# Altium PCB PCB1.pcbdoc
Units mm, origin at the board's own origin, x right, y up, seen from the top; angles counter-clockwise.
Board outline 84.78 x 58.5 mm, 2 copper layers (Top Layer, Bottom Layer); 31 components, 19 nets, 90 pads, 33 vias.
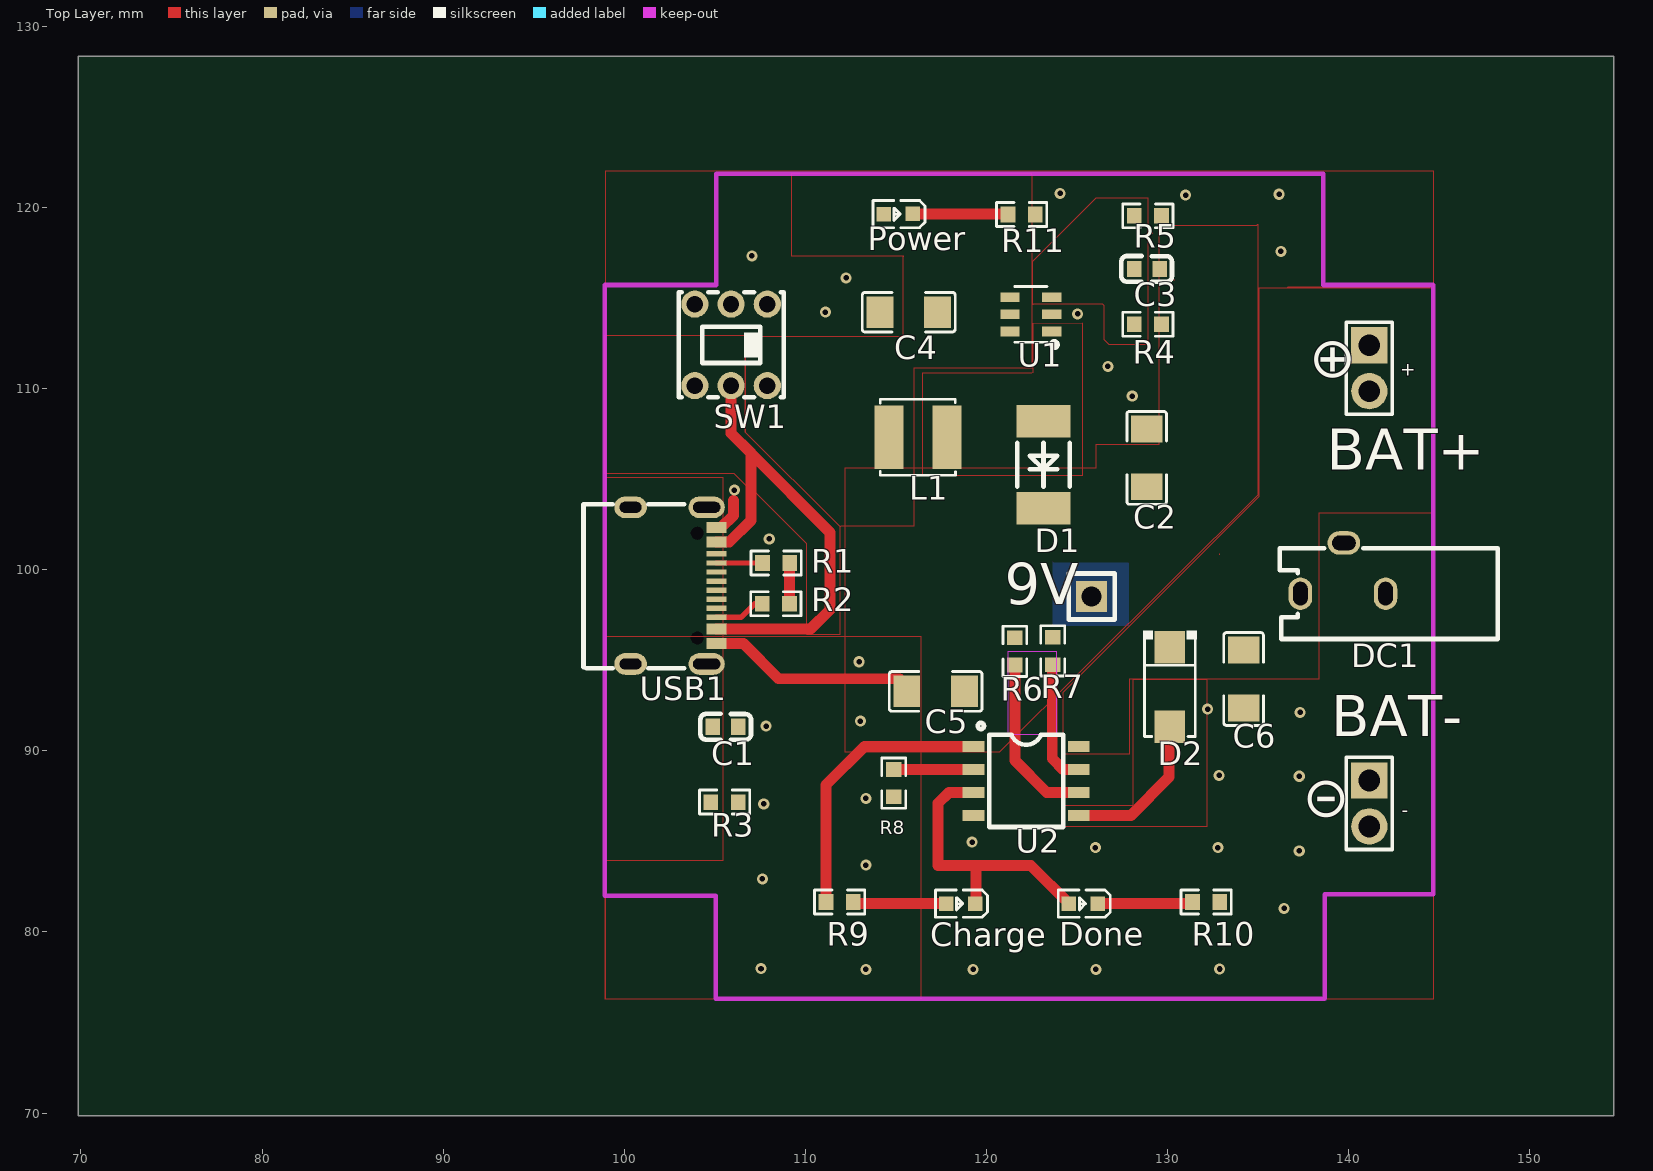
[diagram p0: Top Layer view]
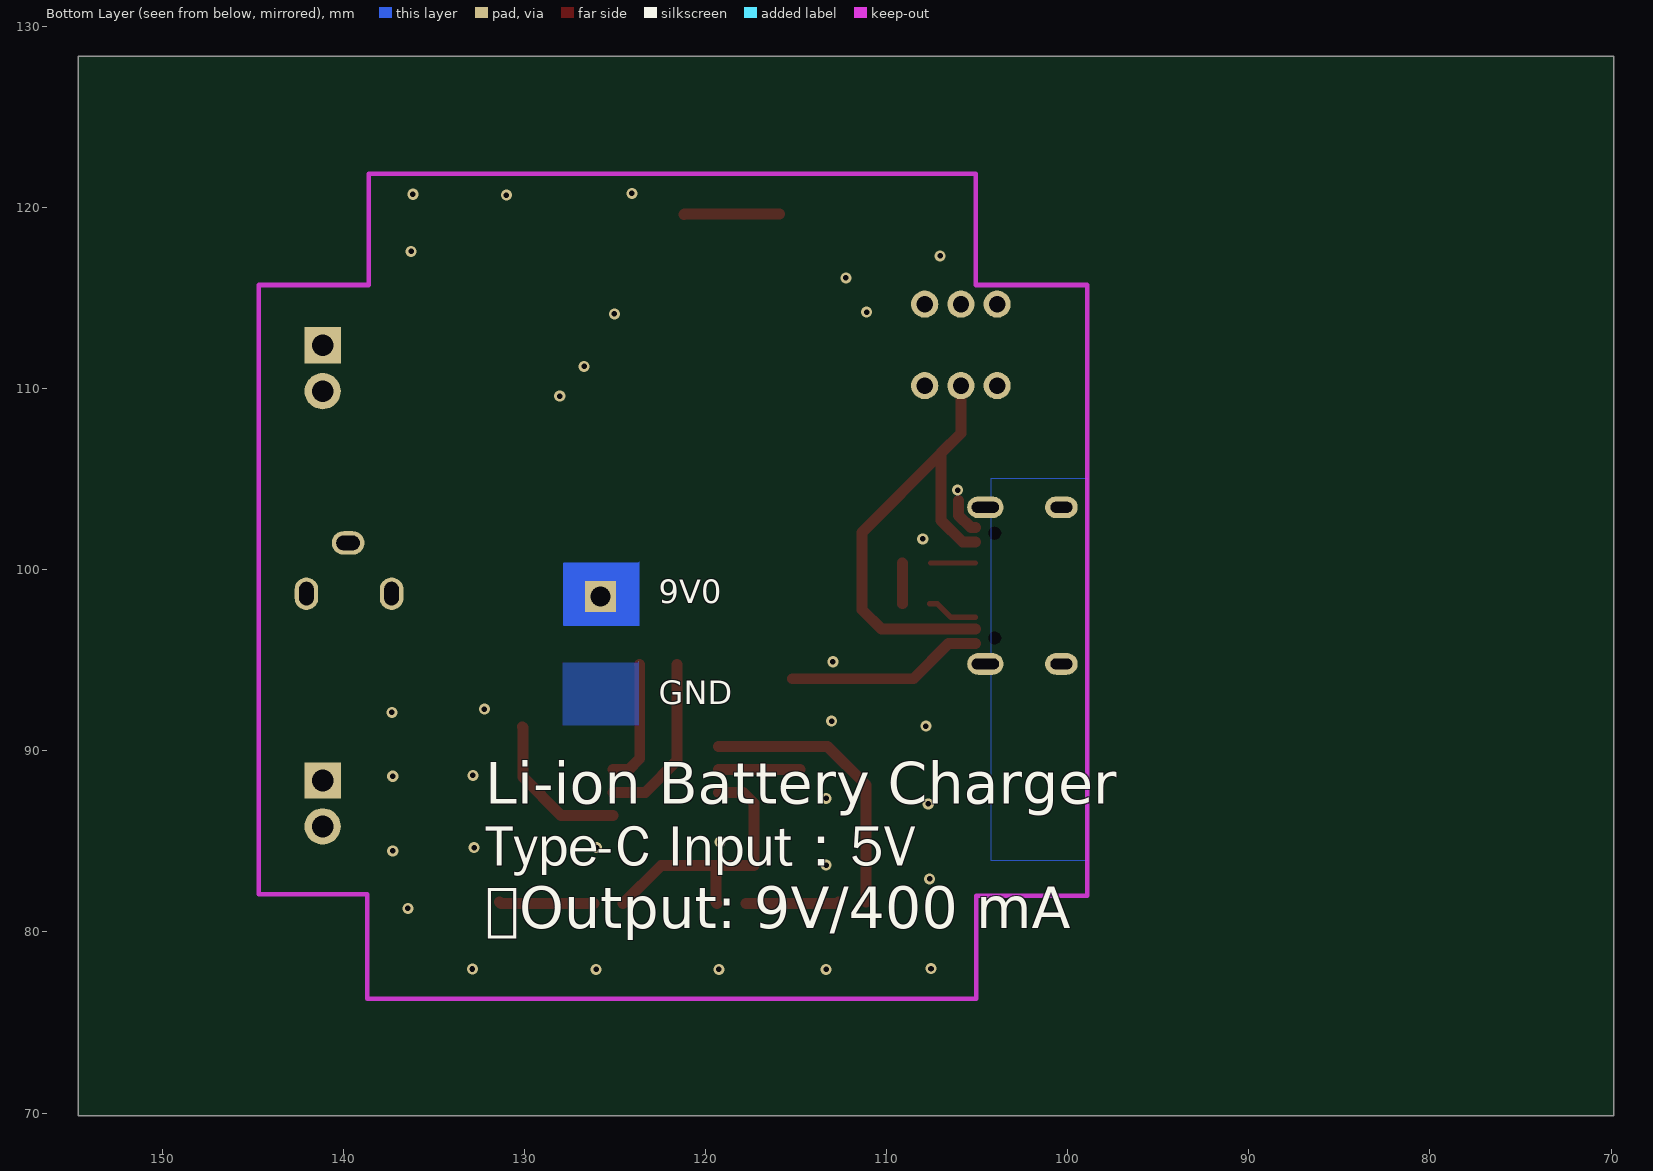
[diagram p1: Bottom Layer view, seen from below]

## Layer stack, top to bottom
Top Layer: signal copper (thickness not stored)
Dielectric: dielectric 0.32, FR-4, Dk 4.8
Bottom Layer: signal copper (thickness not stored)

## Board outline
154.626,69.85 69.85,69.85 69.85,128.346 154.626,128.346

## Components (designator, comment, footprint, x,y, rotation, side; value= is the part's Value field where it differs from the comment)
9V "2.54-1*1P针" HDR-TH_1P-P2.54-V-M 125.795,98.519 r0 top
+ "PZ254V-11-02P" HDR-TH_2P-P2.54-V-M 141.131,111.125 r270 top
- "PZ254V-11-02P" HDR-TH_2P-P2.54-V-M 141.131,87.095 r270 top
C1 "CC0603KRX7R9BB104" C0603 105.589,91.328 r180 top
C2 "CL31A226KAHNNNE" C1206 128.84,106.172 r270 top
C3 "CC0603JRNPO9BN220" C0603 128.846,116.603 r0 top
C4 "CL31A226KAHNNNE" C1206 115.7,114.215 r0 top
C5 "CL31A226KAHNNNE" C1206 117.185,93.28 r0 top
C6 "CL31A226KAHNNNE" C1206 134.189,93.962 r90 top
Charge "NCD0603R1_C84263" LED0603-RD_RED 118.564,81.565 r180 top
D1 "AS5822-AL" SMA-L_L4.4-W2.6-LS5.0-RD 123.14,105.791 r90 top
D2 "1N5819_C437199" SMA_L4.4-W2.6-LS5.0-RD 130.113,93.52 r270 top
DC1 "DC002-1.3" DC-IN-TH_DC002-1.3 139.676,100.074 r90 top
Done "NCD0603R1_C84263" LED0603-RD_RED 125.344,81.565 r180 top
L1 "SWPA4030S4R7MT" IND-SMD_L4.0-W4.0 116.206,107.309 r0 top
Power "NCD0603R1_C84263" LED0603-RD_RED 115.114,119.634 r180 top
R1 "0603WAF5101T5E" R0603 108.381,100.37 r0 top
R2 "0603WAF5101T5E" R0603 108.365,98.117 r0 top
R3 "0603WAF1002T5E" R0603 105.533,87.168 r180 top
R4 "0603WAF2103T5E" R0603 128.902,113.547 r0 top
R5 "0603WAF5101T5E" R0603 128.902,119.532 r0 top
R6 "0603WAF5101T5E" R0603 121.56,95.487 r270 top
R7 "0603WAF5101T5E" R0603 123.648,95.513 r270 top
R8 "NCP18XH103F03RB" R0603 114.874,88.214 r270 top
R9 "0603WAF5101T5E" R0603 111.888,81.649 r0 top
R10 "0603WAF5101T5E" R0603 132.12,81.649 r0 top
R11 "0603WAF5101T5E" R0603 121.933,119.605 r0 top
SW1 "XKB5858-Z" SW-TH_6P-L5.8-W5.8-P2.00-LS4.5-BL 105.894,112.409 r0 top
U1 "LP6238B6F" SOT-23-6_L2.9-W1.6-P0.95-LS2.8-BL 122.439,114.097 r90 top
U2 "IP2312U" ESOP-8_L4.9-W3.9-P1.27-LS6.0-BL-EP 122.186,88.341 r270 top
USB1 "TYPE-C 16PIN 2MD(073)" USB-C-SMD_TYPE-C-6PIN-2MD-073 102.719,99.12 r270 top

## Footprints (in the part's own frame and the unit in brackets; to place one, negate y for a bottom-side part, rotate by r counter-clockwise, add the part's x,y. Pads: shape width x height; smd on the part's side, far side on the other; paste and mask are expansions set on the pad)
C0603 [mm]
  rect 0.8x0.9 smd: 1(-0.7,0) 2(0.7,0)
  silkscreen extent -1.41,-0.71 1.39,0.72
C1206 [mm]
  rect 1.485x1.728 smd: 1(-1.593,0) 2(1.593,0)
  silkscreen extent -2.56,-1.09 2.56,1.09
DC-IN-TH_DC002-1.3 [mm]
  oval 1.8x1.3 hole 0.8 slot 1.3 at 0 deg: 1(-1.4,2.35) 3(-1.4,-2.35)
  oval 1.3x1.8 hole 0.8 slot 1.3 at 90 deg: 2(1.4,-0.05)
  silkscreen extent -3.9,-8.55 1.1,3.5
ESOP-8_L4.9-W3.9-P1.27-LS6.0-BL-EP [mm]
  rect 0.6x1.2 smd: 1(-1.905,-2.908) 2(-0.635,-2.908) 3(0.635,-2.908) 4(1.905,-2.908) 5(1.905,2.908) 6(0.635,2.908) 7(-0.635,2.908) 8(-1.905,2.908)
  silkscreen extent -3.2,-2.67 2.55,2.05
HDR-TH_1P-P2.54-V-M [mm]
  rect 1.7x1.7 hole 1.1: 1(0,0)
  silkscreen extent -1.27,-1.27 1.27,1.27
HDR-TH_2P-P2.54-V-M [mm]
  rect 2x2 hole 1.2: 1(-1.27,0)
  round 2 hole 1.2: 2(1.27,0)
  silkscreen extent -2.54,-1.27 2.54,1.27
IND-SMD_L4.0-W4.0 [mm]
  rect 1.6x3.5 smd: 1(-1.6,0) 2(1.6,0)
  silkscreen extent -2.08,-2.1 2.08,2.1
LED0603-RD_RED [mm]
  rect 0.8x0.8 smd: 1(-0.8,-0.003) 2(0.8,0.003)
  silkscreen extent -1.49,-0.75 1.39,0.76
R0603 [mm]
  rect 0.806x0.864 smd: 1(-0.753,0) 2(0.753,0)
  silkscreen extent -1.39,-0.66 1.39,0.66
SMA-L_L4.4-W2.6-LS5.0-RD [mm]
  rect 1.8x3 smd: 1(-2.4,0) 2(2.4,0)
  silkscreen extent -1.2,-1.45 1.2,1.45
SMA_L4.4-W2.6-LS5.0-RD [mm]
  rect 1.8x1.7 smd: 1(-2.192,0) 2(2.192,0)
  silkscreen extent -3.11,-1.48 2.73,1.48
SOT-23-6_L2.9-W1.6-P0.95-LS2.8-BL [mm]
  rect 0.532x1.072 smd: 1(-0.95,-1.149) 2(0,-1.149) 3(0.95,-1.149) 4(0.95,1.149) 5(0,1.149) 6(-0.95,1.149)
  silkscreen extent -1.82,-1.45 1.54,0.89
SW-TH_6P-L5.8-W5.8-P2.00-LS4.5-BL [mm]
  round 1.5 hole 0.9: 1(-2,-2.25) 2(0,-2.25) 3(2,-2.25) 4(-2,2.25) 5(0,2.25) 6(2,2.25)
  silkscreen extent -2.9,-2.9 2.9,2.9
USB-C-SMD_TYPE-C-6PIN-2MD-073 [mm]
  rect 0.6x1.1 smd: 1(-3.2,2.375) 2(-2.4,2.375) 11(2.4,2.375) 12(3.2,2.375)
  rect 0.3x1.1 smd: 3(-1.75,2.375) 4(-1.25,2.375) 5(-0.75,2.375) 6(-0.25,2.375) 7(0.25,2.375) 8(0.75,2.375) 9(1.25,2.375) 10(1.75,2.375)
  oval 1.2x2 hole 0.6 slot 1.5 at 90 deg: 13(-4.325,1.825) 14(4.325,1.825)
  oval 1.2x1.8 hole 0.6 slot 1.2 at 90 deg: 13(-4.325,-2.375) 14(4.325,-2.375)
  Multi-Layer board cut-out: -2.89,1.655 -3.042,1.62 -3.164,1.523 -3.231,1.383 -3.231,1.227 -3.164,1.087 -3.042,0.99 -2.89,0.955 -2.89,0.955 -2.738,0.99 -2.616,1.087 -2.549,1.227 -2.549,1.383 -2.616,1.523 -2.738,1.62 -2.89,1.655
  Multi-Layer board cut-out: 2.89,1.655 2.738,1.62 2.616,1.523 2.549,1.383 2.549,1.227 2.616,1.087 2.738,0.99 2.89,0.955 2.89,0.955 3.042,0.99 3.164,1.087 3.231,1.227 3.231,1.383 3.164,1.523 3.042,1.62 2.89,1.655
  silkscreen extent -4.5,-4.97 4.57,0.6

## Via types
v1: diameter 0.61, hole 0.305, Top Layer to Bottom Layer, 33 vias

## Nets (pads, with @x,y where several pads share a name; then routed paths per layer and width w, separated by ;. In a path a pad name is that pad's centre, name@x,y a point inside that pad or via, vN(x,y) a via of type N, cw(c..) or ccw(c..) an arc to the next point about the centre after c; other vN are vias at no path point)
$1N581: C1.2 R3.2 USB1.13 USB1.14
$1N716: R1.1 USB1.4 | length 2.5
  Top Layer w0.3: USB1.4 R1.1@107.568,100.37
$1N720: R2.1 USB1.10 | length 2.8
  Top Layer w0.3: USB1.10 106.44,97.37 107.187,98.117 R2.1
$1N1750: R8.1 U2.2 | length 4.5
  Top Layer w0.6: R8.1@114.778,88.976 U2.2
$1N2530: D1.2 L1.2 U1.1
$1N3681: C3.1 R4.1 R5.1 U1.3
$1N8246: R6.2 U2.6 | length 9.6
  Top Layer w0.6: R6.2@121.56,94.759 121.56,89.464 123.318,87.706 U2.6
$1N8621: R7.2 U2.7 | length 6.9
  Top Layer w0.6: R7.2 123.623,94.734 123.623,89.576 124.223,88.976 U2.7
$1N8720: D2.2 U2.5 | length 8.7
  Top Layer w0.6: U2.5 127.966,86.436 130.074,88.544 130.074,91.289 D2.2
$1N8960: Charge.2 R9.2 | length 5.2
  Top Layer w0.6: R9.2 112.729,81.562 Charge.2
$1N8993: Done.1 R10.1 | length 5.3
  Top Layer w0.6: Done.1 131.286,81.569 R10.1
$1N10215: Power.1 R11.1 | length 5.3
  Top Layer w0.6: Power.1 121.147,119.637 R11.1
+5V0: C4.2 L1.1 Power.2 SW1.3 U1.4 U1.5
+5V0_IN: SW1.1 SW1.2 USB1.2 USB1.11 | length 27.4
  Top Layer w0.6: USB1.11 110.284,96.72 111.355,97.79 111.355,102.057 106.986,106.426 ; USB1.2 105.794,101.52 106.986,102.712 106.986,106.426 ; SW1.2 105.894,107.528 106.986,106.436 106.986,106.426
+9V0: 9V.1 C2.2 C3.2 C5.2 D1.1 R4.2 R6.1 R7.1 R9.1 U2.1 | length 15.5
  Top Layer w0.6: R9.1 111.135,88.121 113.26,90.246 U2.1
BAT+: +.1 +.2 C6.2 D2.1 DC1.1 U2.8
GND: -.1 -.2 C1.1 C2.1 C4.1 C5.1 C6.1 DC1.2 DC1.3 R1.2 R2.2 R3.1 R5.2 R8.2 R10.2 R11.2 U1.2 U2.4 USB1.1 USB1.12 | length 15.2
  Top Layer w0.6: USB1.12 106.57,95.92 108.513,93.976 C5.1@115.184,93.976 ; USB1.1 105.344,102.32 106.021,102.997 106.021,103.81 ; R2.2 109.118,100.354 R1.2
  other v1: 113.336,77.927 119.259,77.927 126.036,77.927 132.868,77.953 107.545,77.978 136.424,81.305 107.621,82.931 113.336,83.693 137.263,84.476 126.01,84.658 132.771,84.658 119.203,84.963 107.697,87.071 113.336,87.376 137.263,88.595 132.843,88.646 107.824,91.364 113.031,91.643 137.313,92.126 132.208,92.304 112.962,94.917 108.002,101.702 106.071,104.394 128.042,109.576 126.696,111.227 125.02,114.122 111.101,114.224 112.244,116.103 107.037,117.323 136.247,117.577 130.989,120.675 136.145,120.726 124.055,120.777
STALED: Charge.1 Done.2 U2.3 | length 15.9
  Top Layer w0.6: U2.3 117.924,87.706 117.324,87.106 117.324,83.668 119.424,83.668 ; Charge.1 119.424,81.629 119.424,83.668 ; Done.2 122.439,83.668 119.424,83.668
"": SW1.4 SW1.5 SW1.6 U1.6 USB1.3 USB1.5 USB1.6 USB1.7 USB1.8 USB1.9

## Polygon pours and split planes (outlines as drawn)
$1N581 on Top Layer (solid, remove dead copper, pour order 4): 98.918,83.947 105.462,83.947 105.462,105.071 98.918,105.071
GND on Top Layer (solid, remove dead copper, pour order 8): 98.918,76.301 116.379,76.301 116.379,96.284 98.918,96.284
GND on Top Layer (solid, remove dead copper, pour order 13): 98.934,76.301 144.689,76.301 144.689,121.996 98.934,121.996
$1N581 on Bottom Layer (solid, remove dead copper, pour order 15): 98.918,83.922 104.217,83.922 104.217,105.055 98.918,105.055
GND on Bottom Layer (solid, remove dead copper, pour order 16): 98.909,76.2 144.781,76.2 144.781,121.996 98.909,121.996
BAT+ on Top Layer (solid, remove dead copper, pour order 0): 132.867,100.857 132.868,100.863 132.843,100.838
BAT+ on Top Layer (solid, remove dead copper, pour order 1): 125.667,98.454 125.667,98.476 125.655,98.45
+9V0 on Top Layer (solid, remove dead copper, pour order 2): 130.327,116.003 130.361,116.003 130.354,115.996 130.354,115.976
$1N3681 on Top Layer (solid, remove dead copper, pour order 3): 128.902,120.523 128.902,112.442 128.881,112.42 126.772,112.42 126.493,112.7 126.493,114.579 126.417,114.656 122.581,114.656 122.556,114.63 122.556,117.018 126.061,120.523
$1N2530 on Top Layer (solid, remove dead copper, pour order 5): 125.305,105.213 125.305,113.601 122.536,113.589 122.536,110.877 122.505,110.846 116.435,110.846 116.435,105.213
+5V0_IN on Top Layer (solid, remove dead copper, pour order 6): 98.918,112.935 106.636,112.935 106.681,112.979 106.681,107.599 111.888,102.392 111.888,96.418 110.11,96.418 110.085,96.444 110.085,101.422 107.117,104.39 106.986,104.39 106.068,105.308 98.918,105.308
+5V0 on Top Layer (solid, remove dead copper, pour order 7): 106.681,112.878 115.393,112.878 115.393,117.272 115.419,117.297 109.235,117.297 109.235,121.883 109.246,121.895 122.429,121.895 122.48,121.844 122.48,111.125 115.977,111.125 115.977,102.404 111.955,102.404 111.913,102.362 106.681,107.594
+9V0 on Top Layer (solid, remove dead copper, pour order 9): 129.135,118.567 129.16,118.567
BAT+ on Top Layer (solid, remove dead copper, pour order 11): 136.602,115.57 144.476,115.57 144.502,115.595 136.628,115.595
$1N8720 on Top Layer (solid, remove dead copper, pour order 14): 128.093,93.962 132.143,93.962 132.143,85.801 124.309,85.801 124.236,85.874 124.236,86.989 128.093,86.989
+9V0 on Top Layer (solid, remove dead copper, pour order 10): 129.541,119.024 134.926,119.024 134.977,119.075 134.977,104.101 120.685,89.926 112.208,89.926 112.208,105.639 126.042,105.639 126.042,106.914 129.541,106.914
BAT+ on Top Layer (solid, remove dead copper, pour order 12): 135.054,115.57 144.664,115.57 144.664,103.159 144.629,103.124 138.329,103.124 138.329,93.962 127.869,93.962 127.869,89.814 124.236,89.814 124.236,93.222 135.054,104.04

## Keep-outs
Top Layer:
  region net "": 121.167,90.916 123.883,90.916 123.883,95.467 121.167,95.467
Board Outline Layer:
  lines w0.254 net "": 98.918,81.996 105.045,81.996 105.045,76.301 138.664,76.301 138.664,82.072 144.664,82.072 144.664,115.717 138.588,115.717 138.588,121.869 105.07,121.869 105.07,115.717 98.918,115.717 98.918,81.996

## Other copper
Bottom Layer:
  region net +9V0: 123.648,100.432 123.648,96.898 127.827,96.898 127.848,96.918 127.848,100.351 127.827,100.372 123.708,100.372

## Silkscreen, mask and mechanical layers (free items; w line width, h text height)
Top Silkscreen Layer:
  text "⊕" at 137.809,110.629 h2.27
  text "BAT+" at 138.769,105.523 h2.27
  text "BAT-" at 139.023,90.817 h2.27
  text "⊝" at 137.457,86.372 h2.27
Bottom Silkscreen Layer:
  text "9V0" at 122.572,98.158 h1.3
  text "GND" at 122.572,92.57 h1.3
  text "Li-ion Battery Charger /  Type-C Input：5V /  Output: 9V/400 mA" at 132.16,80.217 h2.29